# EAGLE board CT_schematic (EAGLE 7.6.0)

Size 100 x 80 mm. Coordinates in mm from the lower left corner, seen from the top.
Outline: 0,0 100,0 100,80 0,80 0,0
Copper layers (1*16): Top 0.035mm / dielectric 1.5mm / Bottom 0.035mm
Design rules "default": minimum track width 10mil, minimum drill 24mil, track to track 8mil, track to pad 8mil, pad to pad 8mil, via to via 8mil, smd to smd 8mil, copper to edge 40mil, drill to drill 8mil, minimum pad ring 10mil, minimum via ring 8mil, stop-mask expansion 4mil, vias tented up to drill 0mil, thermal gap 10mil

## Footprints (pad centres in the part's own frame; a part is rotated, then mirrored left to right if it is on the bottom)
C0603 = smd 0.8 x 0.8: 1 -0.762,0; 2 0.762,0
C0402 = smd 0.5 x 0.5: 1 -0.508,0; 2 0.508,0
EXV-9B = smd 2.718 x 1.778: 1 -2.108,0; 2 2.108,0
EXV-9H = smd 3.505 x 1.676: 1 -2.857,0; 2 2.857,0
PJ-037B_PACKAGE = drill 3.7 square: 1 12,0 | drill 3.2 square: 2 6,0
R0603 = smd 0.8 x 0.8: 1 -0.762,0; 2 0.762,0
LQFP48 = smd 0.3 x 1.2: 1 -2.75,-4.25; 2 -2.25,-4.25; 3 -1.75,-4.25; 4 -1.25,-4.25; 5 -0.75,-4.25; 6 -0.25,-4.25; 7 0.25,-4.25; 8 0.75,-4.25; 9 1.25,-4.25; 10 1.75,-4.25; 11 2.25,-4.25; 12 2.75,-4.25; 25 2.75,4.25; 26 2.25,4.25; 27 1.75,4.25; 28 1.25,4.25; 29 0.75,4.25; 30 0.25,4.25; 31 -0.25,4.25; 32 -0.75,4.25; 33 -1.25,4.25; 34 -1.75,4.25; 35 -2.25,4.25; 36 -2.75,4.25 | smd 1.2 x 0.3: 13 4.25,-2.75; 14 4.25,-2.25; 15 4.25,-1.75; 16 4.25,-1.25; 17 4.25,-0.75; 18 4.25,-0.25; 19 4.25,0.25; 20 4.25,0.75; 21 4.25,1.25; 22 4.25,1.75; 23 4.25,2.25; 24 4.25,2.75; 37 -4.25,2.75; 38 -4.25,2.25; 39 -4.25,1.75; 40 -4.25,1.25; 41 -4.25,0.75; 42 -4.25,0.25; 43 -4.25,-0.25; 44 -4.25,-0.75; 45 -4.25,-1.25; 46 -4.25,-1.75; 47 -4.25,-2.25; 48 -4.25,-2.75
SOIC-8 = smd 1.6 x 0.6: 1 -2.7,1.905 | smd 1.55 x 0.6: 2 -2.7,0.635; 3 -2.7,-0.635; 4 -2.7,-1.905; 5 2.7,-1.905; 6 2.7,-0.635; 7 2.7,0.635; 8 2.7,1.905
TST-110-05-T-D-RA = drill 1 pad 1.7 square: 1 0,0 | drill 1 pad 1.7: 2 0,2.54; 3 2.54,0; 4 2.54,2.54; 5 5.08,0; 6 5.08,2.54; 7 7.62,0; 8 7.62,2.54; 9 10.16,0; 10 10.16,2.54; 11 12.7,0; 12 12.7,2.54; 13 15.24,0; 14 15.24,2.54; 15 17.78,0; 16 17.78,2.54; 17 20.32,0; 18 20.32,2.54; 19 22.86,0; 20 22.86,2.54
SOT-23-8 = smd 0.4 x 1.2: 1 -0.975,-1.3; 2 -0.325,-1.3; 3 0.325,-1.3; 4 0.975,-1.3; 5 0.975,1.3; 6 0.325,1.3; 7 -0.325,1.3; 8 -0.975,1.3
182-009-MALE = drill 1.194 pad 1.524 octagon: 1 -5.537,10.923; 2 -2.769,10.923; 3 0,10.923; 4 2.769,10.923; 5 5.537,10.923; 6 -4.153,8.08; 7 -1.384,8.08; 8 1.384,8.08; 9 4.153,8.08 | hole 3.048: -12.446,9.501; 12.446,9.501
TDFN-8/6MM = smd 0.3 x 0.75: 1 0,0; 2 0.5,0; 3 1,0; 4 1.5,0; 5 1.5,3; 6 1,3; 7 0.5,3; 8 0,3
ASEK = smd 1.4 x 1: 1 -1.1,-0.8; 2 1.1,-0.8; 3 1.1,0.8; 4 -1.1,0.8
ASFL1 = smd 1.7 x 1.5: 1 -1.27,-1.1; 2 1.27,-1.1; 3 1.27,1.1; 4 -1.27,1.1
LP2954 = smd 1.6 x 0.6: 1 -2.475,1.905 | smd 1.55 x 0.6: 2 -2.475,0.635; 3 -2.475,-0.635; 4 -2.475,-1.905; 5 2.475,-1.905; 6 2.475,-0.635; 7 2.475,0.635; 8 2.475,1.905
SON-6 = smd 0.55 x 0.3: 1 -0.355,0.5 | smd 0.52 x 0.3: 2 -0.37,0; 3 -0.37,-0.5; 4 0.37,-0.5; 5 0.37,0; 6 0.37,0.5
SW_4-1437565-2 = smd 1.4 x 2.1: 1 -2.23,4.55; 2 -2.23,-4.55; 3 2.23,4.55; 4 2.23,-4.55
LGM67K-G1J2-24-Z = smd 0.8 x 1.4: A -2,0; C 0,0
NC7SZ125M5X = smd 1.3 x 0.7: 1 -1.3,0.95; 2 -1.3,0; 3 -1.3,-0.95; 4 1.3,-0.95; 5 1.3,0.95
DUMMY_PACKAGE_129 = drill 0.3: 1 0,-1; 2 1.5,-1; 3 3,-1

## Placement (x,y rotation side)
C1  1e-06  [C0603]  -48.26,68.58 0 top  (outside the outline)
C2  1e-07  [C0603]  -52.07,68.58 0 top  (outside the outline)
C3  1e-07  [C0603]  -55.88,68.58 0 top  (outside the outline)
C4  1e-07  [C0603]  -59.69,68.58 0 top  (outside the outline)
C5  1e-07  [C0603]  -63.5,68.58 0 top  (outside the outline)
C6  1e-07  [C0603]  -67.31,68.58 0 top  (outside the outline)
C7  4.7e-06  [C0603]  -44.45,68.58 0 top  (outside the outline)
C8  1e-08  [C0603]  -71.12,68.58 0 top  (outside the outline)
C9  1e-06  [C0603]  -15.24,73.66 0 top  (outside the outline)
C10  1e-08  [C0402]  -45.72,73.66 0 top  (outside the outline)
C11  1e-07  [C0402]  -49.53,73.66 0 top  (outside the outline)
C12  1e-07  [C0402]  -53.34,73.66 0 top  (outside the outline)
C13  1e-08  [C0402]  -57.15,73.66 0 top  (outside the outline)
C14  1e-08  [C0402]  -60.96,73.66 0 top  (outside the outline)
C15  1e-08  [C0402]  -64.77,73.66 0 top  (outside the outline)
C16  1e-06  [EXV-9B]  -55.88,54.61 0 top  (outside the outline)
C17  2.2e-06  [EXV-9B]  -64.77,54.61 0 top  (outside the outline)
C18  1e-07  [C0402]  -68.58,73.66 0 top  (outside the outline)
C19  0.0001  [EXV-9H]  -17.78,55.88 0 top  (outside the outline)
C20  0.0001  [EXV-9H]  -29.21,55.88 0 top  (outside the outline)
C21  1e-08  [C0402]  -72.39,73.66 0 top  (outside the outline)
C22  1e-08  [C0402]  -15.24,78.74 0 top  (outside the outline)
J1  PJ-037B  [PJ-037B_PACKAGE]  -67.31,7.62 0 top  (outside the outline)
R1  10000.0  [R0603]  -64.77,62.23 0 top  (outside the outline)
R2  1000.0  [R0603]  -19.05,73.66 0 top  (outside the outline)
R3  1600.5  [R0603]  -22.86,73.66 0 top  (outside the outline)
R4  4700.0  [R0603]  -26.67,73.66 0 top  (outside the outline)
R5  2200.0  [R0603]  -30.48,73.66 0 top  (outside the outline)
R6  2200.0  [R0603]  -34.29,73.66 0 top  (outside the outline)
R7  10000.0  [R0603]  -69.85,62.23 0 top  (outside the outline)
R8  10000.0  [R0603]  -15.24,68.58 0 top  (outside the outline)
R9  10000.0  [R0603]  -20.32,68.58 0 top  (outside the outline)
R10  10000.0  [R0603]  -25.4,68.58 0 top  (outside the outline)
R11  10000.0  [R0603]  -30.48,68.58 0 top  (outside the outline)
R12  120.0  [R0603]  -38.1,73.66 0 top  (outside the outline)
R13  100000.0  [R0603]  -34.29,62.23 0 top  (outside the outline)
R14  100000.0  [R0603]  -39.37,62.23 0 top  (outside the outline)
R15  100000.0  [R0603]  -44.45,62.23 0 top  (outside the outline)
R16  164658.62  [R0603]  -29.21,62.23 0 top  (outside the outline)
R17  100000.0  [R0603]  -49.53,62.23 0 top  (outside the outline)
R18  10000.0  [R0603]  -35.56,68.58 0 top  (outside the outline)
R19  10000.0  [R0603]  -40.64,68.58 0 top  (outside the outline)
R20  9100.0  [R0603]  -41.91,73.66 0 top  (outside the outline)
R21  680000.0  [R0603]  -54.61,62.23 0 top  (outside the outline)
R22  120000.0  [R0603]  -59.69,62.23 0 top  (outside the outline)
U1  STM32L431CCT6  [LQFP48]  -44.45,27.94 0 top  (outside the outline)
U2  AT25080B-SSHL-T  [SOIC-8]  -41.91,39.37 0 top  (outside the outline)
U3  TST-110-05-T-D-RA  [TST-110-05-T-D-RA]  -46.99,45.72 0 top  (outside the outline)
U4  MAX3051EKA+T  [SOT-23-8]  -49.53,54.61 0 top  (outside the outline)
U5  182-009-113R531  [182-009-MALE]  -36.83,6.35 0 top  (outside the outline)
U6  24AA02T-I/MNY  [TDFN-8/6MM]  -60.96,26.67 0 top  (outside the outline)
U7  ASEK-32.768KHz-ECST  [ASEK]  -66.04,48.26 0 top  (outside the outline)
U8  ASFL1-25MHZ-NCS  [ASFL1]  -59.69,38.1 0 top  (outside the outline)
U9  LP2954AIMX/NOPB  [LP2954]  -25.4,39.37 0 top  (outside the outline)
U10  TPS3895ADRYR  [SON-6]  -24.13,77.47 0 top  (outside the outline)
U11  4-1437565-2  [SW_4-1437565-2]  -27.94,27.94 0 top  (outside the outline)
U12  Q65110A2395  [LGM67K-G1J2-24-Z]  -39.37,55.88 0 top  (outside the outline)
U13  nc7sz125m5x  [NC7SZ125M5X]  -15.24,62.23 0 top  (outside the outline)
U14  nc7sz125m5x  [NC7SZ125M5X]  -21.59,62.23 0 top  (outside the outline)
U15  Dummy  [DUMMY_PACKAGE_129]  -21.59,78.74 0 top  (outside the outline)

## Library data of the parts
C1-C22 J1 R1-R22 U1-U15 = circuit_tree

## Nets
CLK_U1_3: U1.3 U7.3
CLK_U1_5: U1.5 U8.3
GND: C1.2 C2.2 C3.2 C4.2 C5.2 C6.2 C7.2 C8.2 C9.2 C10.2 C11.2 C12.2 C13.2 C14.2 C15.2 C16.2 C17.2 C18.2 C19.2 C20.2 C21.2 C22.2 J1.2 R2.2 R7.2 R13.2 R17.2 R20.2 R22.2 U1.8 U1.23 U1.35 U1.47 U2.4 U3.4 U3.6 U3.8 U3.10 U3.12 U3.14 U3.16 U3.18 U3.20 U4.2 U5.5 U6.4 U6.7 U7.2 U8.2 U9.4 U10.2 U12.C U13.2 U13.3 U14.1 U14.3 U15.1
NET_U1_7: R4.1 U1.7 U14.4
NET_U1_30: R5.1 U1.30 U6.6
NET_U1_31: R6.1 U1.31 U6.5
NET_U1_44: R7.1 U1.44
NET_U1_45: R3.1 U1.45 U12.A
NET_U1_46: R1.1 U1.46 U11.3 U11.4
NET_U2_3: R8.1 U2.3
NET_U2_7: R10.1 U2.7
NET_U4_6: R12.2 U4.6
NET_U4_8: R13.1 U4.8
NET_U5_2: R12.2 U4.6 U5.2
NET_U5_3: R12.1 U4.7 U5.3
NET_U9_3: R15.1 U9.3
NET_U9_5: R14.1 U9.5
NET_U9_7: R16.2 R17.1 U9.7
NET_U10_1: R19.1 R20.1 U10.1
NET_U10_3: R21.2 R22.1 U10.3
NET_U10_4: R18.1 U10.4 U13.4 U14.2
NET_U11_1: R2.1 U11.1 U11.2
PROC_ADC1_IN10: U1.15 U15.2
PROC_ADC1_IN16: U1.19 U15.3
PROC_CAN1_RX: U1.32 U4.4
PROC_CAN1_TX: U1.33 U4.1
PROC_SPI1_MISO: U1.16 U2.2
PROC_SPI1_MOSI: U1.17 U2.5
PROC_SPI1_NSS: R9.1 U1.14 U2.1
PROC_SPI1_SCK: U1.11 U2.6
PROC_SYS_JTCK_SWCLK: U1.37 U3.9
PROC_SYS_JTDO_SWO: U1.39 U3.13
PROC_SYS_JTMS_SWDIO: U1.34 U3.7
RST_OUT_U3_SRESET_B: R11.1 U3.15 U13.1
VCC_S1_14V8: C16.1 C19.1 C20.1 J1.1 R15.2 U9.8
VCC_TIER1_3V3: C1.1 C2.1 C3.1 C4.1 C5.1 C6.1 C7.1 C8.1 C9.1 C10.1 C11.1 C12.1 C13.1 C14.1 C15.1 C17.1 C18.1 C21.1 C22.1 R1.2 R3.2 R4.2 R5.2 R6.2 R8.2 R9.2 R10.2 R11.2 R14.2 R16.1 R18.2 R19.2 R21.1 U1.1 U1.9 U1.24 U1.36 U1.48 U2.8 U3.1 U4.3 U6.8 U7.4 U8.4 U9.1 U10.6 U13.5 U14.5

## Tracks (layer width: path | path; a pad name or v marks a point on that pad's centre or on a via)
CLK_U1_3  (1 unrouted)
CLK_U1_5  (1 unrouted)
GND  (56 unrouted)
NET_U1_7  (2 unrouted)
NET_U1_30  (2 unrouted)
NET_U1_31  (2 unrouted)
NET_U1_44  (1 unrouted)
NET_U1_45  (2 unrouted)
NET_U1_46  (3 unrouted)
NET_U2_3  (1 unrouted)
NET_U2_7  (1 unrouted)
NET_U4_6  (1 unrouted)
NET_U4_8  (1 unrouted)
NET_U5_2  (2 unrouted)
NET_U5_3  (2 unrouted)
NET_U9_3  (1 unrouted)
NET_U9_5  (1 unrouted)
NET_U9_7  (2 unrouted)
NET_U10_1  (2 unrouted)
NET_U10_3  (2 unrouted)
NET_U10_4  (3 unrouted)
NET_U11_1  (2 unrouted)
PROC_ADC1_IN10  (1 unrouted)
PROC_ADC1_IN16  (1 unrouted)
PROC_CAN1_RX  (1 unrouted)
PROC_CAN1_TX  (1 unrouted)
PROC_SPI1_MISO  (1 unrouted)
PROC_SPI1_MOSI  (1 unrouted)
PROC_SPI1_NSS  (2 unrouted)
PROC_SPI1_SCK  (1 unrouted)
PROC_SYS_JTCK_SWCLK  (1 unrouted)
PROC_SYS_JTDO_SWO  (1 unrouted)
PROC_SYS_JTMS_SWDIO  (1 unrouted)
RST_OUT_U3_SRESET_B  (2 unrouted)
VCC_S1_14V8  (5 unrouted)
VCC_TIER1_3V3  (47 unrouted)